# Altium PCB Pmod_8LD.PcbDoc
Units mm, origin at the board's own origin, x right, y up, seen from the top; angles counter-clockwise.
Board outline 20 x 30 mm, 2 copper layers (Top Layer, Bottom Layer); 29 components, 34 nets, 84 pads, 6 vias.
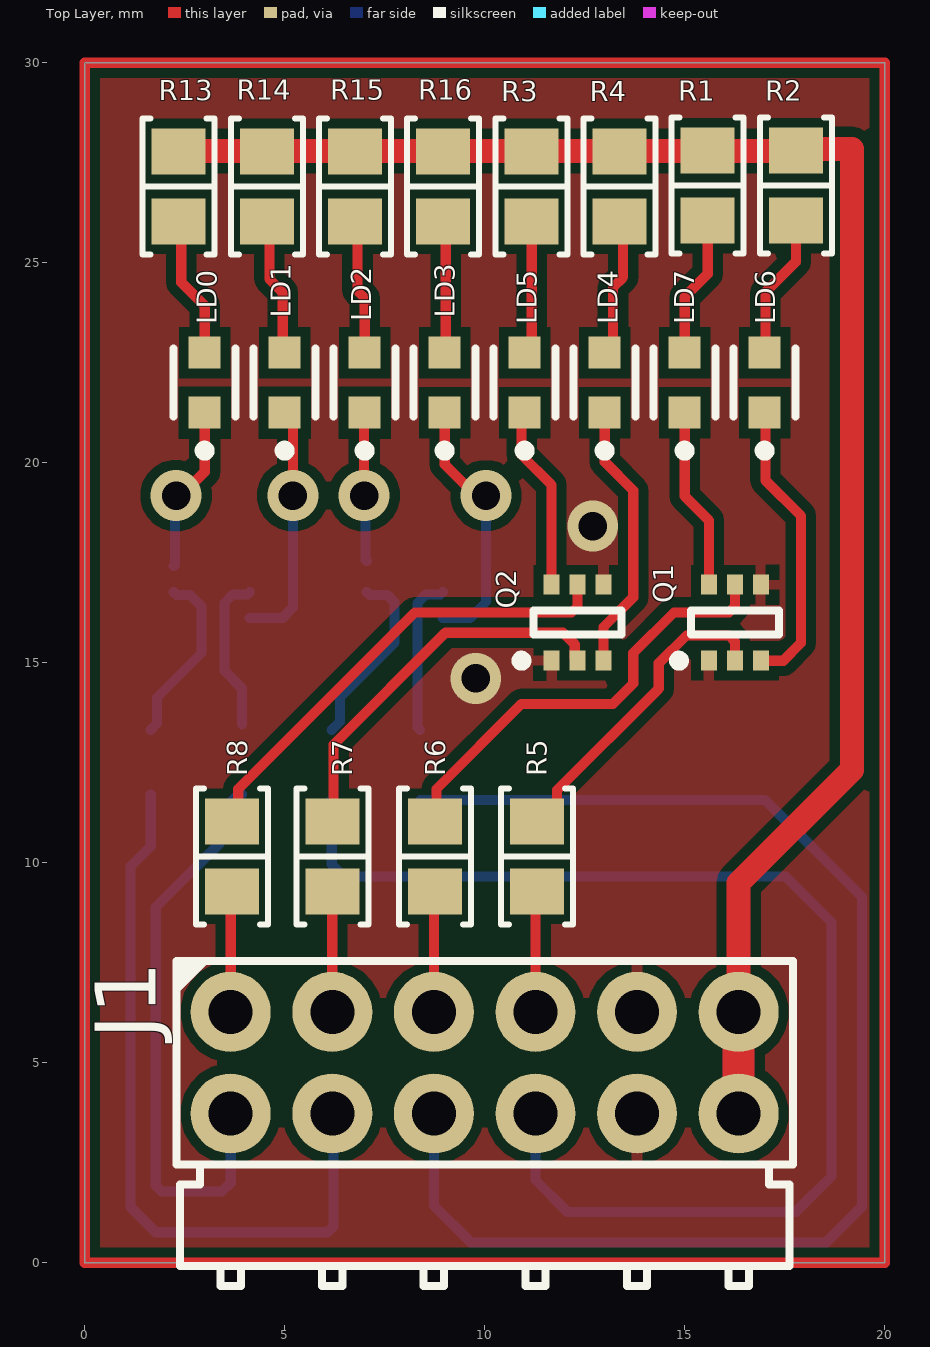
[diagram p0: Top Layer view]
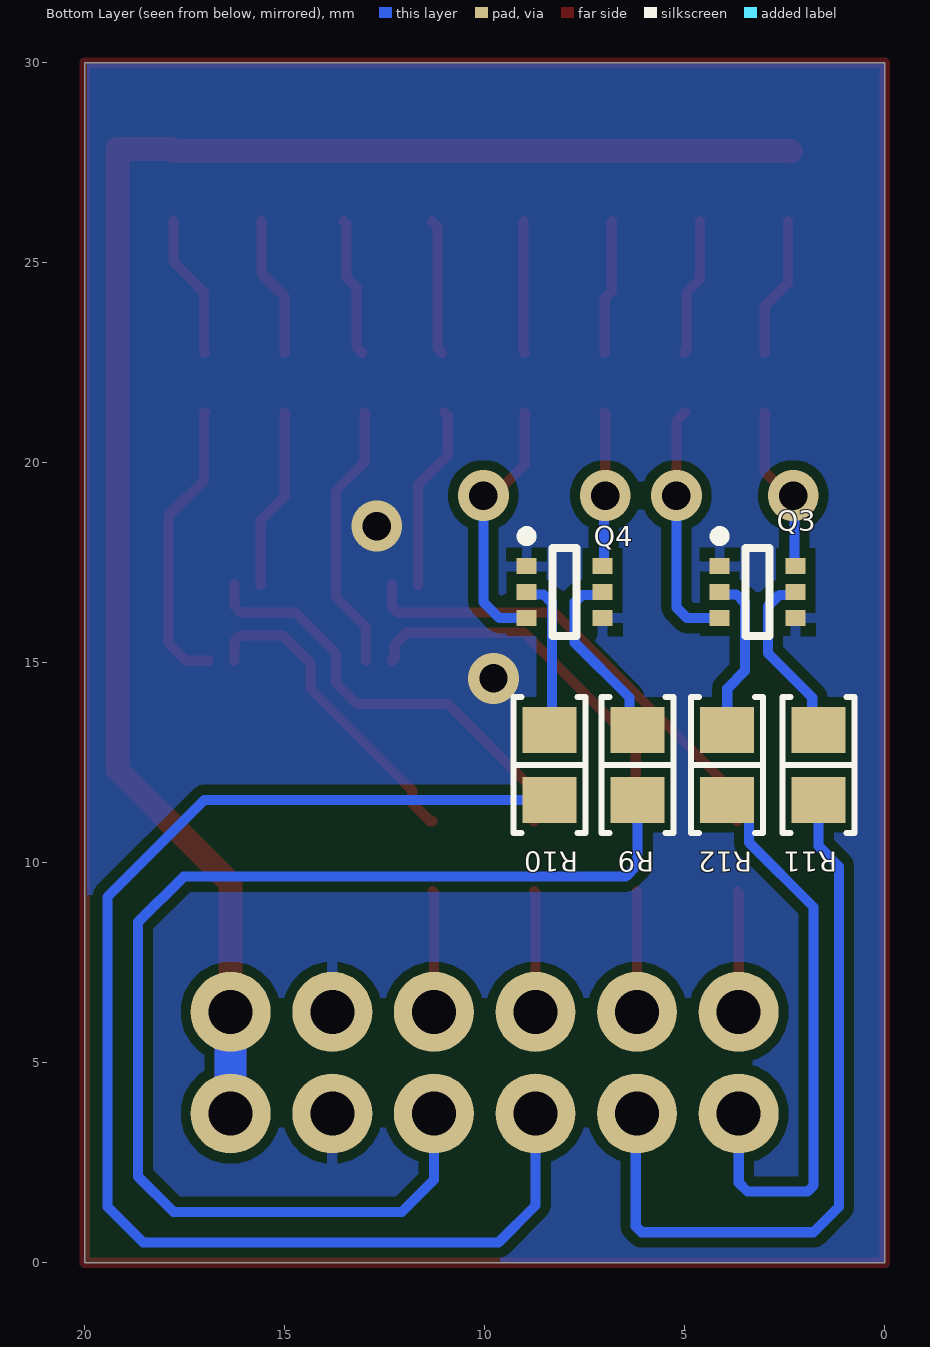
[diagram p1: Bottom Layer view, seen from below]
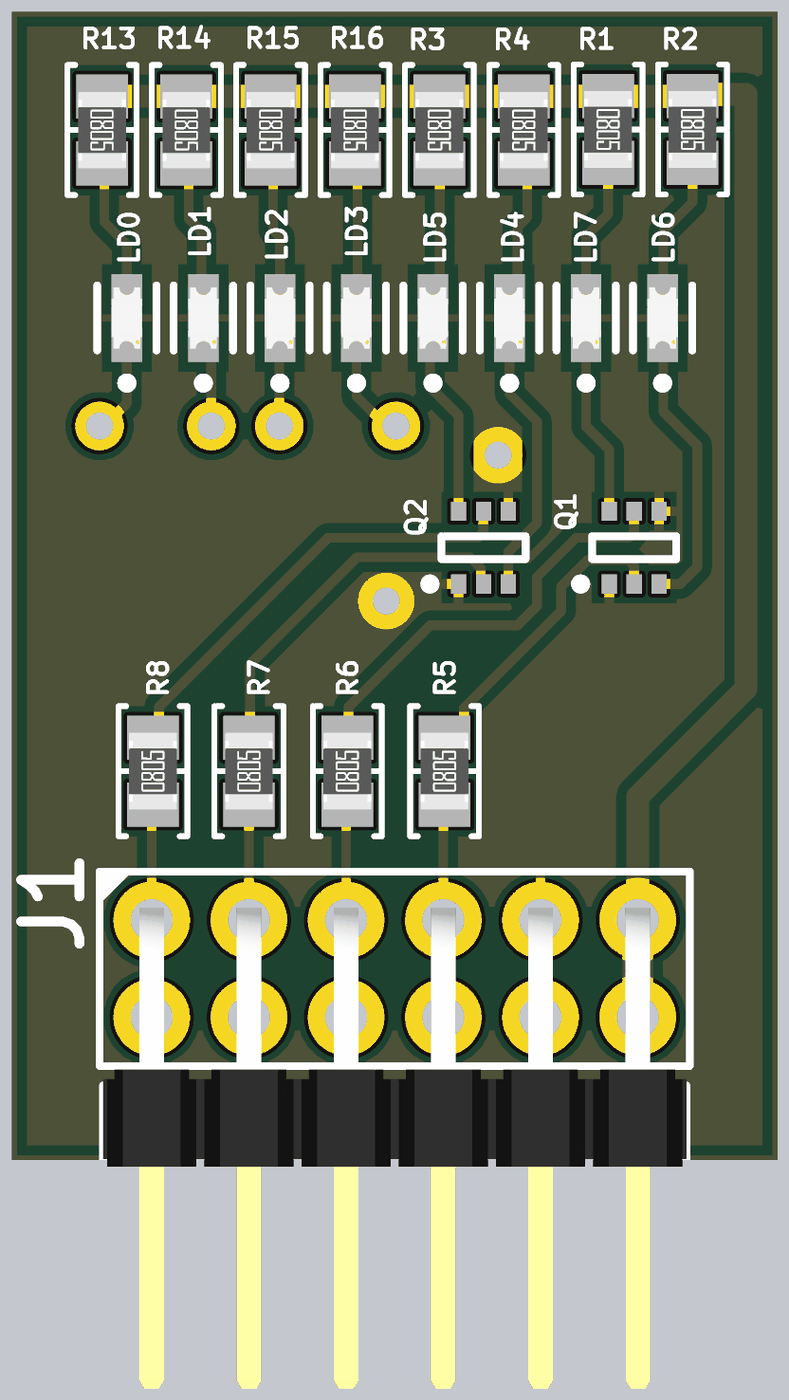
[diagram p2: 3D render of the assembled board from above, using the file's embedded part models]
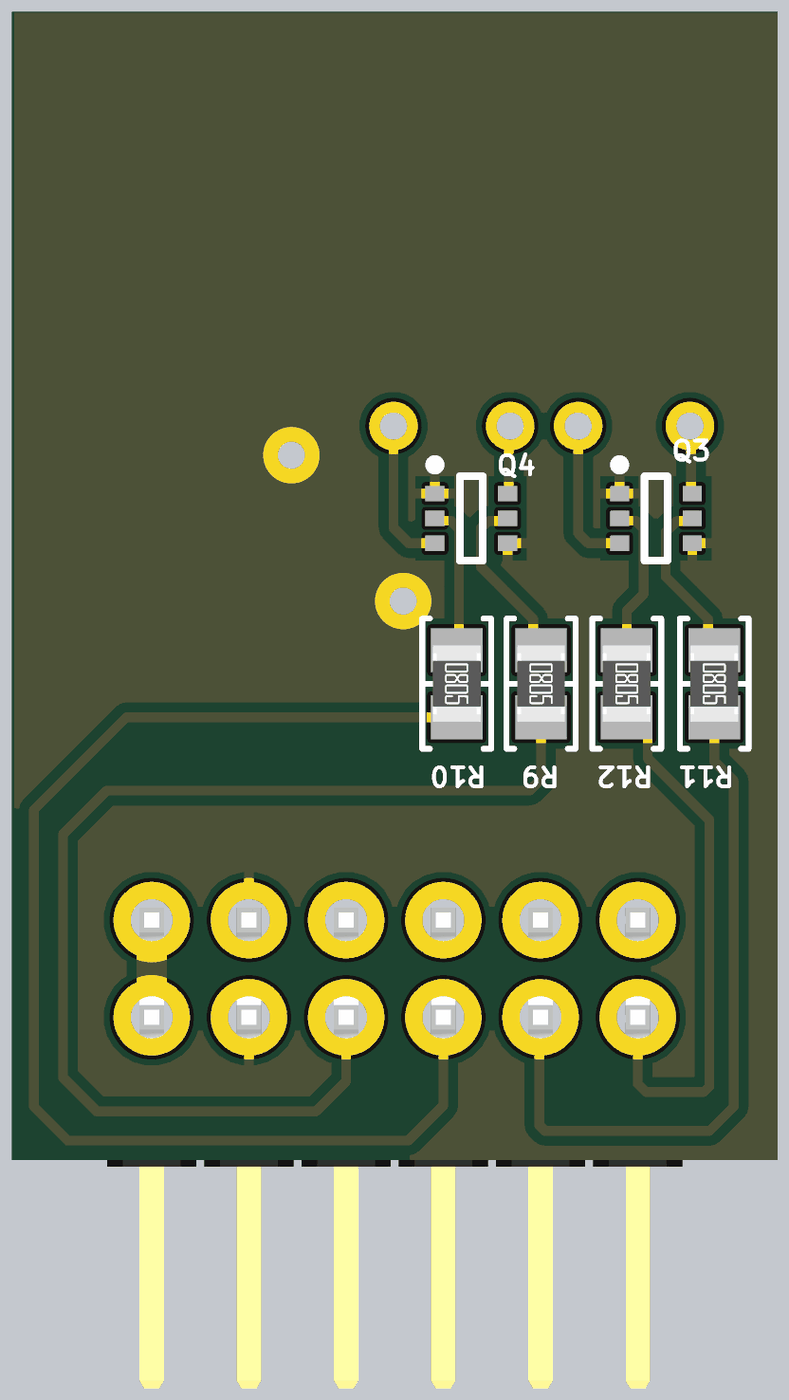
[diagram p3: 3D render of the assembled board from below, using the file's embedded part models]

## Layer stack, top to bottom
Top Solder: solder mask 0.0102, Solder Resist, Dk 3.5
Top Layer: signal copper 0.0356
Dielectric 1: dielectric 0.32, FR-4, Dk 4.8
Bottom Layer: signal copper 0.0356
Bottom Solder: solder mask 0.0102, Solder Resist, Dk 3.5

## Board outline
0,0 0,30 20,30 20,0

## Design rules (kind name [scope] priority, off if disabled: settings)
Clearance [All] p1: gap=0.254 ignorepadtopadclearanceinfootprint=FALSE except(0: Arc-Hole Track-Hole SMDPad-Hole THPad-Hole Via-Hole Fill-Hole Poly-Hole Region-Hole Text-Hole)
PolygonConnect [All] p1: connectstyle=Relief reliefconductorwidth=0.254 reliefentries=4 polygonreliefangle="90 Angle" airgapwidth=0.254
RoutingVias [All] p1: holewidth=0.711 width=1.27 viastyle="Through Hole" minholewidth=0.711 minwidth=1.27 maxholewidth=0.711 maxwidth=1.27
SolderMaskExpansion [All] p1: expansion=0.102 istentingtop=FALSE
Width [All] p1: maxlimit=0.6 minlimit=0.254 preferedwidth=0.254
30 further rules are at their usual default settings.

## Components (designator, comment, footprint, x,y, rotation, side; value= is the part's Value field where it differs from the comment)
J1 "M20-9740646" "HARWIN M20-9740645" 10,5 r0 top
LD0 "HSMG-C191" FP-HSMG-C191-MFG 3,22 r90 top
LD1 "HSMG-C191" FP-HSMG-C191-MFG 5,22 r90 top
LD2 "HSMG-C191" FP-HSMG-C191-MFG 7,22 r90 top
LD3 "HSMG-C191" FP-HSMG-C191-MFG 9,22 r90 top
LD4 "HSMG-C191" FP-HSMG-C191-MFG 13,22 r90 top
LD5 "HSMG-C191" FP-HSMG-C191-MFG 11,22 r90 top
LD6 "HSMG-C191" FP-HSMG-C191-MFG 17,22 r90 top
LD7 "HSMG-C191" FP-HSMG-C191-MFG 15,22 r90 top
Q1 "BC846BDW1T1G" ONSC-SOT-363-6-419B-02_W_V 16.256,16 r90 top
Q2 "BC846BDW1T1G" ONSC-SOT-363-6-419B-02_W_V 12.319,16 r90 top
Q3 "BC846BDW1T1G" ONSC-SOT-363-6-419B-02_W_V 3.175,16.764 r180 bottom
Q4 "BC846BDW1T1G" ONSC-SOT-363-6-419B-02_W_V 8.001,16.764 r180 bottom
R1 "390 Ohms" "RES 0805_2012" 15.576,26.924 r270 top
R2 "390 Ohms" "RES 0805_2012" 17.78,26.924 r270 top
R3 "390 Ohms" "RES 0805_2012" 11.167,26.91 r270 top
R4 "390 Ohms" "RES 0805_2012" 13.371,26.91 r270 top
R5 "2.2 kOhms" "RES 0805_2012" 11.303,10.16 r90 top
R6 "2.2 kOhms" "RES 0805_2012" 8.763,10.16 r90 top
R7 "2.2 kOhms" "RES 0805_2012" 6.19,10.16 r90 top
R8 "2.2 kOhms" "RES 0805_2012" 3.683,10.16 r90 top
R9 "2.2 kOhms" "RES 0805_2012" 6.178,12.446 r270 bottom
R10 "2.2 kOhms" "RES 0805_2012" 8.382,12.446 r270 bottom
R11 "2.2 kOhms" "RES 0805_2012" 1.651,12.446 r270 bottom
R12 "2.2 kOhms" "RES 0805_2012" 3.937,12.446 r270 bottom
R13 "390 Ohms" "RES 0805_2012" 2.35,26.91 r270 top
R14 "390 Ohms" "RES 0805_2012" 4.554,26.91 r270 top
R15 "390 Ohms" "RES 0805_2012" 6.759,26.91 r270 top
R16 "390 Ohms" "RES 0805_2012" 8.963,26.91 r270 top

## Footprints (in the part's own frame and the unit in brackets; to place one, negate y for a bottom-side part, rotate by r counter-clockwise, add the part's x,y. Pads: shape width x height; smd on the part's side, far side on the other; paste and mask are expansions set on the pad)
FP-HSMG-C191-MFG [mm]
  rect 0.8x0.8 smd paste+0 mask+0: 1(-0.75,0) 2(0.75,0)
  silkscreen extent -1.82,-0.77 0.85,0.78, body extent -1.25,-0.55 1.25,0.55, height 0.25
"HARWIN M20-9740645" [mm] "2.54mm DIL PC TAIL PIN HEADER ASSEMBLY"
  round 2 hole 1.1: 1(-6.35,1.27) 2(-3.81,1.27) 3(-1.27,1.27) 4(1.27,1.27) 5(3.81,1.27) 6(6.35,1.27) 7(6.35,-1.27) 8(3.81,-1.27) 9(1.27,-1.27) 10(-1.27,-1.27) 11(-3.81,-1.27) 12(-6.35,-1.27)
  silkscreen extent -7.73,-5.59 7.71,2.57, body extent -7.62,-10.97 7.62,1.59, height 5
ONSC-SOT-363-6-419B-02_W_V [mm] "SOT23, 6-Leads, Body 2x1.25mm, Pitch 0.65mm"
  rect 0.5x0.4 smd: 1(-0.95,0.65) 2(-0.95,0) 3(-0.95,-0.65) 4(0.95,-0.65) 5(0.95,0) 6(0.95,0.65)
  silkscreen extent -1.07,-1.1 0.3,1.52, body extent -0.63,-1 0.63,1, height 1.1
"RES 0805_2012" [mm] "Chip Resistor, 2-Leads, Body 2.00x1.25mm, IPC Medium Density"
  rect 1.15x1.35 smd: 1(-0.875,0) 2(0.875,0)
  silkscreen extent -1.7,-0.9 1.7,0.9, body extent -1,-0.62 1,0.63, height 0.6

## Part data
J1: "CONN HEADER R/A 12POS 2.54MM", Current Rating (Amps)="3A per Contact", manufacturer="Harwin Inc.", Material Flammability Rating="UL94 V-0", Operating Temperature="-40°C ~ 105°C", Supplier Part Number 1=M20-9740646-ND, Insulation Color=Black, componentlink1description=Datasheet, componentlink1url=https://cdn.harwin.com/pdfs/M20-974.pdf, componentlink2description="DigiKey Link", componentlink2url=http://digikey.com/product-detail/en/harwin-inc/M20-9740646/M20-9740646-ND/3920719, Connector Type="Header, Cuttable", Contact Finish - Mating=Tin, Contact Finish - Post=Tin, Contact Material=Brass, Contact Shape=Square, Contact Type="Male Pin", Fastening Type=Push-Pull, lastupdated="21.09.2022 19:18:29", Lifecycle Status=Active, Minimum Order=1500, Mounting Type="Through Hole, Right Angle", Number of Positions=12, Number of Positions Loaded=All, Number of Rows=2, packaging=Bulk, Part Number=M20-9740646, Part Status=Active, partid=159, price=0.27, series=M20, Shrouding=Unshrouded, Style="Board to Board or Cable", Supplier 1=DigiKey, Termination=Solder, Insulation Material="Polyamide (PA6T), Nylon 6T"
LD0 LD1 LD2 LD3 LD4 LD5 LD6 LD7: library part CMP-18399-000001-1, "LED GREEN DIFFUSED CHIP SMD", Colour=Green, Forward Current=20mA, Forward Voltage=2.2V, manufacturer=Broadcom, Max Junction Temp=+95°C, Package=0, Power Dissipation=52mW, Reverse Voltage=5V, Temperature="-40°C to +85°C", Temperature Range High=+85°C, Temperature Range Low=-40°C, Automotive=No, Category=Diode, componentlink2description=Datasheet, componentlink2url=https://docs.broadcom.com/docs/AV02-0551EN, Device Class L1=Optoelectronics, Device Class L2=LEDs, Device Class L3=unset, Digikey Description="LED GREEN DIFFUSED CHIP SMD", Footprint 0 Description="SM LED; 2 Flat Leads", Height=0.7mm, Lead Free=Yes, Led Orientation="Top View", Luminous Intensity=15mcd, Manufacturer Part Number=HSMG-C191, Mouser Description="LED Uni-Color Green 570nm 2-Pin Chip LED T/R", Octopart=https://octopart.com/hsmg-c191-broadcom-71131308, Peak Emmision Wavelength=570nm, RoHS=TRUE, Viewing Angle=170°, Wavelength=572nm, Ipc Land Pattern Name=DIOC16080X45
Q1 Q2 Q3 Q4: library part CMP-1048-00850-1, "Dual General Purpose Transistors, NPN, 6-Pin SOT-363, Pb-Free, Tape and Reel", manufacturer="On Semiconductor", componentlink1description="Manufacturer URL", componentlink1url=http://www.onsemi.com/, componentlink2description=Datasheet, componentlink2url=http://www.onsemi.cn/pub_link/Collateral/BC846BDW1T1-D.PDF, ComponentLink3Description="Package Specification", ComponentLink3URL=http://www.onsemi.com/pub_link/Collateral/NTJD4001N-D.PDF, DatasheetVersion="Rev. 9", fT Min (MHz)=100, Mounting Technology="Surface Mount", PackageDescription="6-Pin Small Outline Transistor, Body 2 x 1.25 mm, Pitch 0.65 mm", PackageReference=SOT-363-6-419B-02_W, PackageVersion="Rev. W, 01/2006", Packing="Tape and Reel", PartNumber=BC846BDW1T1G, Polarity="Dual NPN", RoHS=TRUE, IC Continuous (A)=0.1
R1 R2 R3 R4 R13 R14 R15 R16: library part AC0805JR-07390RL, "RES SMD 390 OHM 5% 1/8W 0805", Device Package="0805 (2012 Metric)", manufacturer=Yageo, Operating Temperature="-55°C ~ 155°C", Power (Watts)="0.125W, 1/8W", Ratings=AEC-Q200, Supplier Device Package=0805, Supplier Part Number 1=YAG3786CT-ND, Temperature Coefficient=±100ppm/°C, Tolerance=±5%, componentlink1description=Datasheet, componentlink1url=https://www.yageo.com/upload/media/product/productsearch/datasheet/rchip/PYu-AC_51_RoHS_L_7.pdf, componentlink2description="DigiKey Link", componentlink2url=https://www.digikey.com/en/products/detail/yageo/AC0805JR-07390RL/5897130, Composition="Thick Film", Features="Automotive AEC-Q200, Moisture Resistant", Height - Seated (Max)="0.024\" (0.60mm)", lastupdated="13.07.2023 19:38:07", Lifecycle Status=Active, Minimum Order=1, Number of Terminations=2, Package / Case="0805 (2012 Metric)", packaging=TapeAndReel, Part Number=AC0805JR-07390RL, Part Status=Active, partid=46464, price=0.01, Resistance="390 Ohms", series=AC, Size / Dimension="0.079\" L x 0.049\" W (2.00mm x 1.25mm)", Supplier 1=DigiKey
R5 R6 R7 R8 R9 R10 R11 R12: library part RG2012L-222-L-T05, "RES SMD 2.2KOHM 0.01% 1/10W 0805", Device Package="0805 (2012 Metric)", manufacturer=Susumu, Operating Temperature="-55°C ~ 155°C", Power (Watts)="0.1W, 1/10W", Ratings=AEC-Q200, Supplier Device Package=0805, Supplier Part Number 1=408-1635-1-ND, Temperature Coefficient=±2ppm/°C, Tolerance=±0.01%, componentlink1description=Datasheet, componentlink1url=http://www.susumu-usa.com/pdf/FootPrint_8_9.pdf, componentlink2description="DigiKey Link", componentlink2url=https://www.digikey.com/en/products/detail/susumu/RG2012L-222-L-T05/3738063, Composition="Thin Film", Features="Anti-Sulfur, Automotive AEC-Q200", Height - Seated (Max)="0.020\" (0.50mm)", lastupdated="13.07.2023 19:38:21", Lifecycle Status=Active, Minimum Order=1, Number of Terminations=2, Package / Case="0805 (2012 Metric)", packaging=TapeAndReel, Part Number=RG2012L-222-L-T05, Part Status=Active, partid=40974, price=1.76, Resistance="2.2 kOhms", series=RG, Size / Dimension="0.079\" L x 0.049\" W (2.00mm x 1.25mm)", Supplier 1=DigiKey

## Via types
v1: diameter 1.27, hole 0.711, Top Layer to Bottom Layer, 6 vias

## Nets (pads, with @x,y where several pads share a name; then routed paths per layer and width w, separated by ;. In a path a pad name is that pad's centre, name@x,y a point inside that pad or via, vN(x,y) a via of type N, cw(c..) or ccw(c..) an arc to the next point about the centre after c; other vN are vias at no path point)
GND: J1.5 J1.8 Q1.1 Q1.4 Q2.1 Q2.4 Q3.1 Q3.4 Q4.1 Q4.4
  other v1: 9.779,14.605 12.7,18.415
NetJ1_1: J1.1 R8.1 | length 3
  Top Layer w0.254: J1.1 3.65,9.252 R8.1
NetJ1_2: J1.2 R7.1 | length 3
  Top Layer w0.254: J1.2 R7.1@6.19,9.285
NetJ1_3: J1.3 R6.1 | length 3
  Top Layer w0.254: J1.3 8.73,9.252 R6.1
NetJ1_4: J1.4 R5.1 | length 3
  Top Layer w0.254: J1.4 11.27,9.252 R5.1
NetJ1_9: J1.9 R9.2 | length 30.8
  Bottom Layer w0.254: R9.2 6.178,9.951 6.477,9.652 17.526,9.652 18.669,8.509 18.669,2.159 17.78,1.27 12.065,1.27 11.27,2.065 J1.9
NetJ1_10: J1.10 R10.2 | length 33.6
  Bottom Layer w0.254: R10.2 17.004,11.571 19.431,9.144 19.431,1.397 18.542,0.508 9.652,0.508 8.73,1.43 J1.10
NetJ1_11: J1.11 R11.2 | length 18.7
  Bottom Layer w0.254: R11.2@1.651,11.698 1.651,10.414 1.143,9.906 1.143,1.397 1.778,0.762 6.074,0.762 6.223,0.911 6.223,3.697 J1.11
NetJ1_12: J1.12 R12.2 | length 14.5
  Bottom Layer w0.254: J1.12 3.65,1.999 3.429,1.778 1.927,1.778 1.778,1.927 1.778,8.89 3.389,10.501 3.389,11.264 3.837,11.712 R12.2@3.937,11.712
NetLD0_1: LD0.1 Q3.6 | length 4.2
  Top Layer w0.254: v1@2.286,19.05 2.286,19.059 3,19.773 LD0.1
  Bottom Layer w0.254: Q3.6 2.256,17.444 2.256,19.02 v1@2.286,19.05
  other v1: 2.286,19.177
NetLD0_2: LD0.2 R13.2 | length 3.5
  Top Layer w0.254: R13.2@2.413,26.035 2.413,24.511 3,23.924 LD0.2
NetLD1_1: LD1.1 Q3.3 | length 6.1
  Top Layer w0.254: LD1.1 5.207,21.043 v1@5.207,19.05
  Bottom Layer w0.254: Q3.3 4.938,16.114 5.207,16.383 v1@5.207,19.05
  other v1: 5.207,19.177
NetLD1_2: LD1.2 R14.2 | length 3.4
  Top Layer w0.254: R14.2@4.617,26.035 4.617,24.593 4.953,24.257 4.953,22.797 LD1.2
NetLD2_1: LD2.1 Q4.6 | length 3.7
  Top Layer w0.254: v1(6.985,19.177) 6.985,21.235 LD2.1
  Bottom Layer w0.254: v1(6.985,19.177) 7.018,19.144 7.018,17.574 Q4.6@7.051,17.541
NetLD2_2: LD2.2 R15.2 | length 3.4
  Top Layer w0.254: R15.2@6.822,26.035 6.822,24.293 7,24.115 LD2.2
NetLD3_1: LD3.1 Q4.3 | length 6.4
  Top Layer w0.254: LD3.1 9,19.956 v1@10.033,18.923
  Bottom Layer w0.254: Q4.3 9.63,16.114 10.033,16.517 v1@10.033,18.923
  other v1: 10.033,19.177
NetLD3_2: LD3.2 R16.2 | length 3.3
  Top Layer w0.254: LD3.2 9.026,22.776 R16.2@9.026,26.035
NetLD4_1: LD4.1 Q2.3 | length 6.8
  Top Layer w0.254: Q2.3 12.969,15.89 13.716,16.637 13.716,19.304 13,20.02 LD4.1
NetLD4_2: LD4.2 R4.2 | length 3.5
  Top Layer w0.254: LD4.2@13.063,22.75 13.208,22.895 13.208,24.384 13.462,24.638 13.462,25.972 R4.2@13.525,26.035
NetLD5_1: LD5.1 Q2.6 | length 4.6
  Top Layer w0.254: LD5.1 10.922,21.172 10.922,20.193 11.669,19.446 Q2.6
NetLD5_2: LD5.2 R3.2 | length 3.4
  Top Layer w0.254: LD5.2@11.063,22.75 11.176,22.863 11.176,25.89 R3.2@11.321,26.035
NetLD6_1: LD6.1 Q1.3 | length 7.3
  Top Layer w0.254: Q1.3 17.463,15.05 17.907,15.494 17.907,18.669 17.018,19.558 17.018,21.232 LD6.1
NetLD6_2: LD6.2 R2.2 | length 3.6
  Top Layer w0.254: LD6.2 17.018,22.768 17.018,24.257 17.78,25.019 R2.2
NetLD7_1: LD7.1 Q1.6 | length 4.6
  Top Layer w0.254: LD7.1 15,19.163 15.606,18.557 Q1.6
NetLD7_2: LD7.2 R1.2 | length 3.5
  Top Layer w0.254: LD7.2 15,24.144 15.576,24.72 R1.2
NetQ1_2: Q1.2 R5.2 | length 8
  Top Layer w0.254: R5.2 11.361,11.035 11.809,11.483 11.809,11.809 14.351,14.351 14.351,14.986 15.046,15.681 16.107,15.681 16.256,15.532 Q1.2
NetQ1_5: Q1.5 R6.2 | length 11.2
  Top Layer w0.254: R6.2 8.794,11.066 8.794,11.842 10.922,13.97 13.208,13.97 13.716,14.478 13.716,15.24 14.732,16.256 16.107,16.256 16.256,16.405 Q1.5
NetQ2_2: Q2.2 R7.2 | length 9.7
  Top Layer w0.254: R7.2 6.223,11.068 6.223,12.954 9.017,15.748 11.96,15.748 12.25,15.458 12.25,15.119 Q2.2
NetQ2_5: Q2.5 R8.2 | length 11.8
  Top Layer w0.254: R8.2 3.841,11.193 3.841,11.842 8.255,16.256 12.17,16.256 12.319,16.405 Q2.5
NetQ3_2: Q3.2 R12.1 | length 4
  Bottom Layer w0.254: R12.1@3.937,13.462 3.937,14.351 3.494,14.794 3.494,16.493 3.705,16.703 4.064,16.703 Q3.2
NetQ3_5: Q3.5 R11.1 | length 4.5
  Bottom Layer w0.254: R11.1 1.809,13.479 1.809,14.128 2.921,15.24 2.921,16.407 2.633,16.695 2.294,16.695 Q3.5
NetQ4_2: Q4.2 R10.1 | length 3.9
  Bottom Layer w0.254: R10.1 8.32,13.383 8.32,16.493 8.531,16.703 8.89,16.703 Q4.2
NetQ4_5: Q4.5 R9.1 | length 4.6
  Bottom Layer w0.254: R9.1 6.381,13.525 6.381,14.128 7.747,15.494 7.747,16.51 7.562,16.695 7.12,16.695 Q4.5
VCC: J1.6 J1.7 R1.1 R2.1 R3.1 R4.1 R13.1 R14.1 R15.1 R16.1 | length 57.6
  Top Layer w0.254: R13.1@2.413,27.785 R14.1 R15.1 R16.1 R3.1 R4.1 R4.1@13.525,27.785 ; R1.1@15.929,27.785 R2.1@17.78,27.785
  Top Layer w0.6: R13.1 2.357,27.792 17.773,27.792 R2.1 17.824,27.843 19.177,27.843 19.177,12.319 16.35,9.492 J1.6
  Top Layer w0.8: J1.7 J1.6
  Bottom Layer w0.8: J1.7 J1.6
copper on no net: | length 100
  Top Layer w0.254: 0,0 20,0 20,30 0,30 0,0

## Polygon pours and split planes (outlines as drawn)
GND on Top Layer "GND_L01_P000" (solid, remove dead copper, pour order 0): 0,0 20,0 20,30 0,30
GND on Bottom Layer "GND_L02_P001" (solid, remove dead copper, pour order 1): 0,0 0,29.972 19.939,29.972 19.939,0